# Altium PCB PMSM_M007U_Fan.PcbDoc
Units mil, origin at the board's own origin, x right, y up, seen from the top; angles counter-clockwise.
Board outline 2867 x 1502 mil, 2 copper layers (Top Layer, Bottom Layer); 65 components, 42 nets, 188 pads, 168 vias.
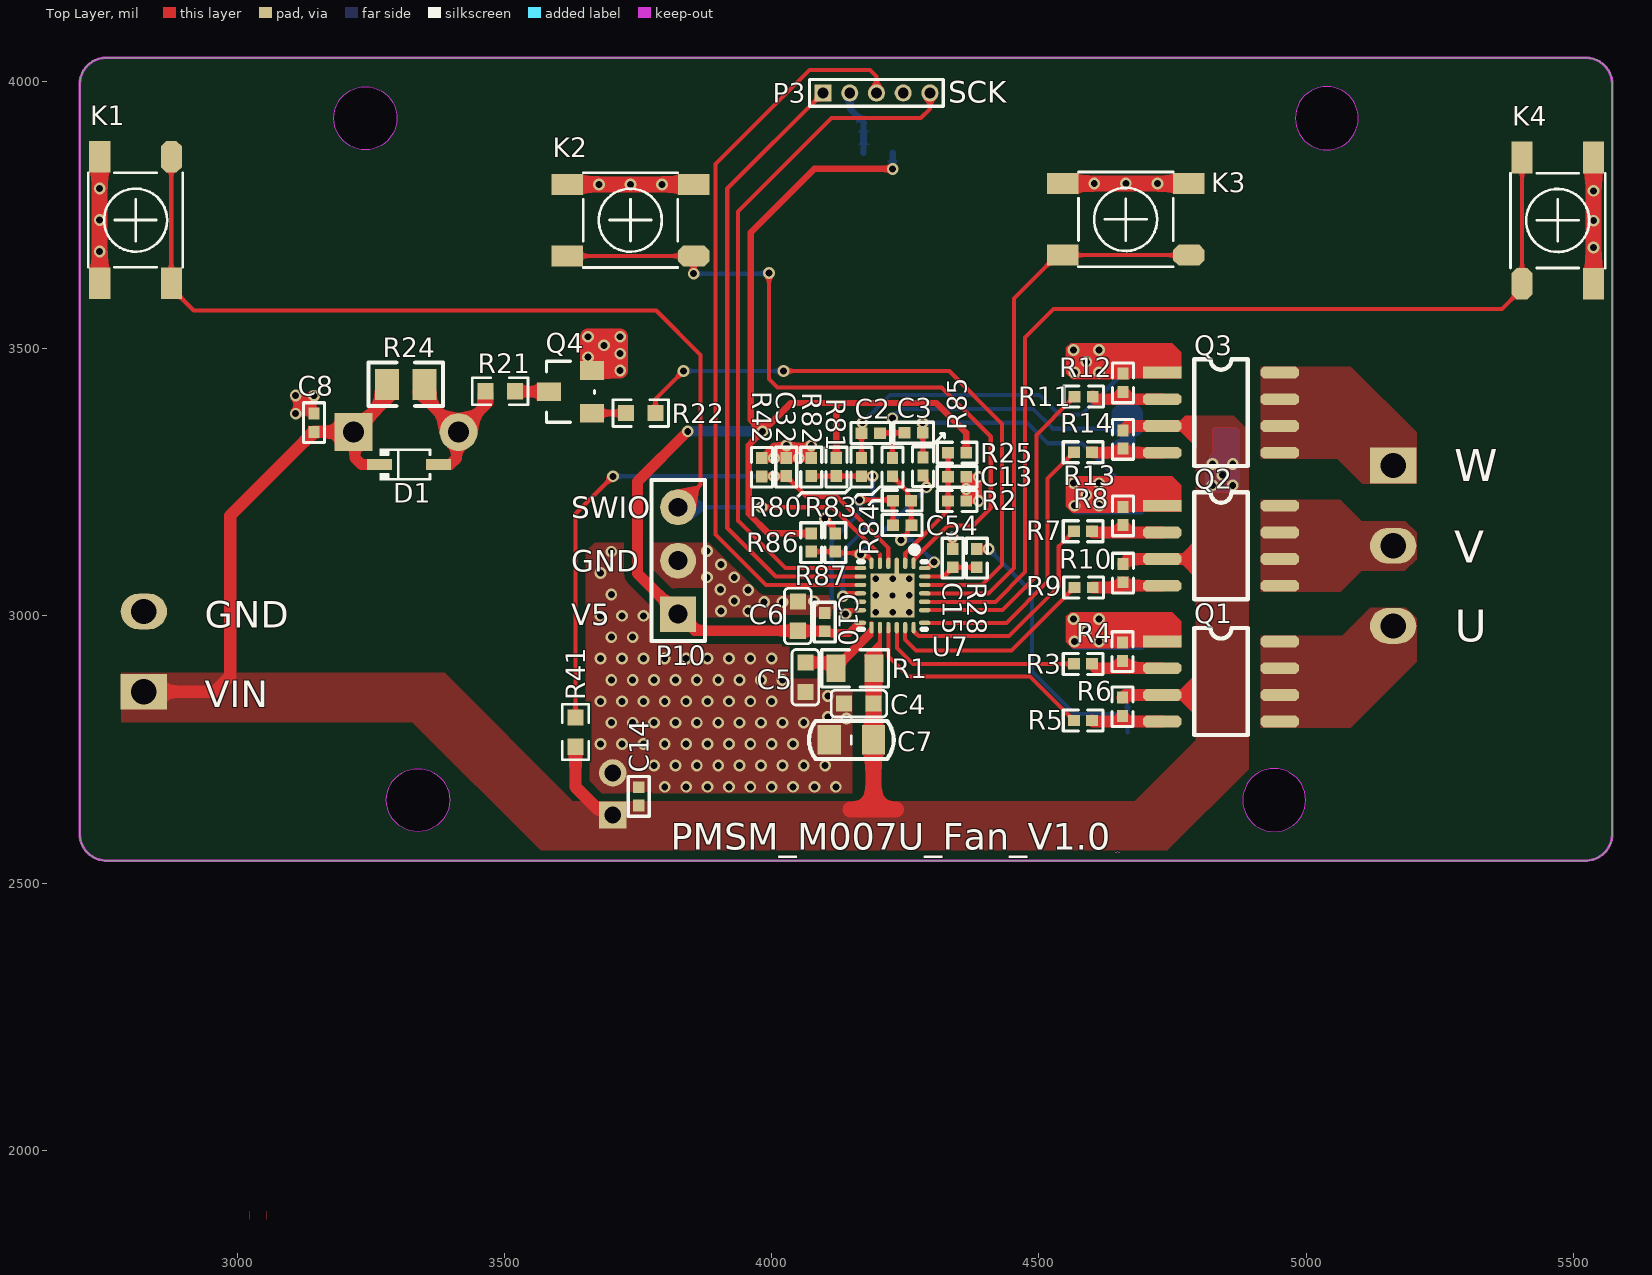
[diagram p0: Top Layer view]
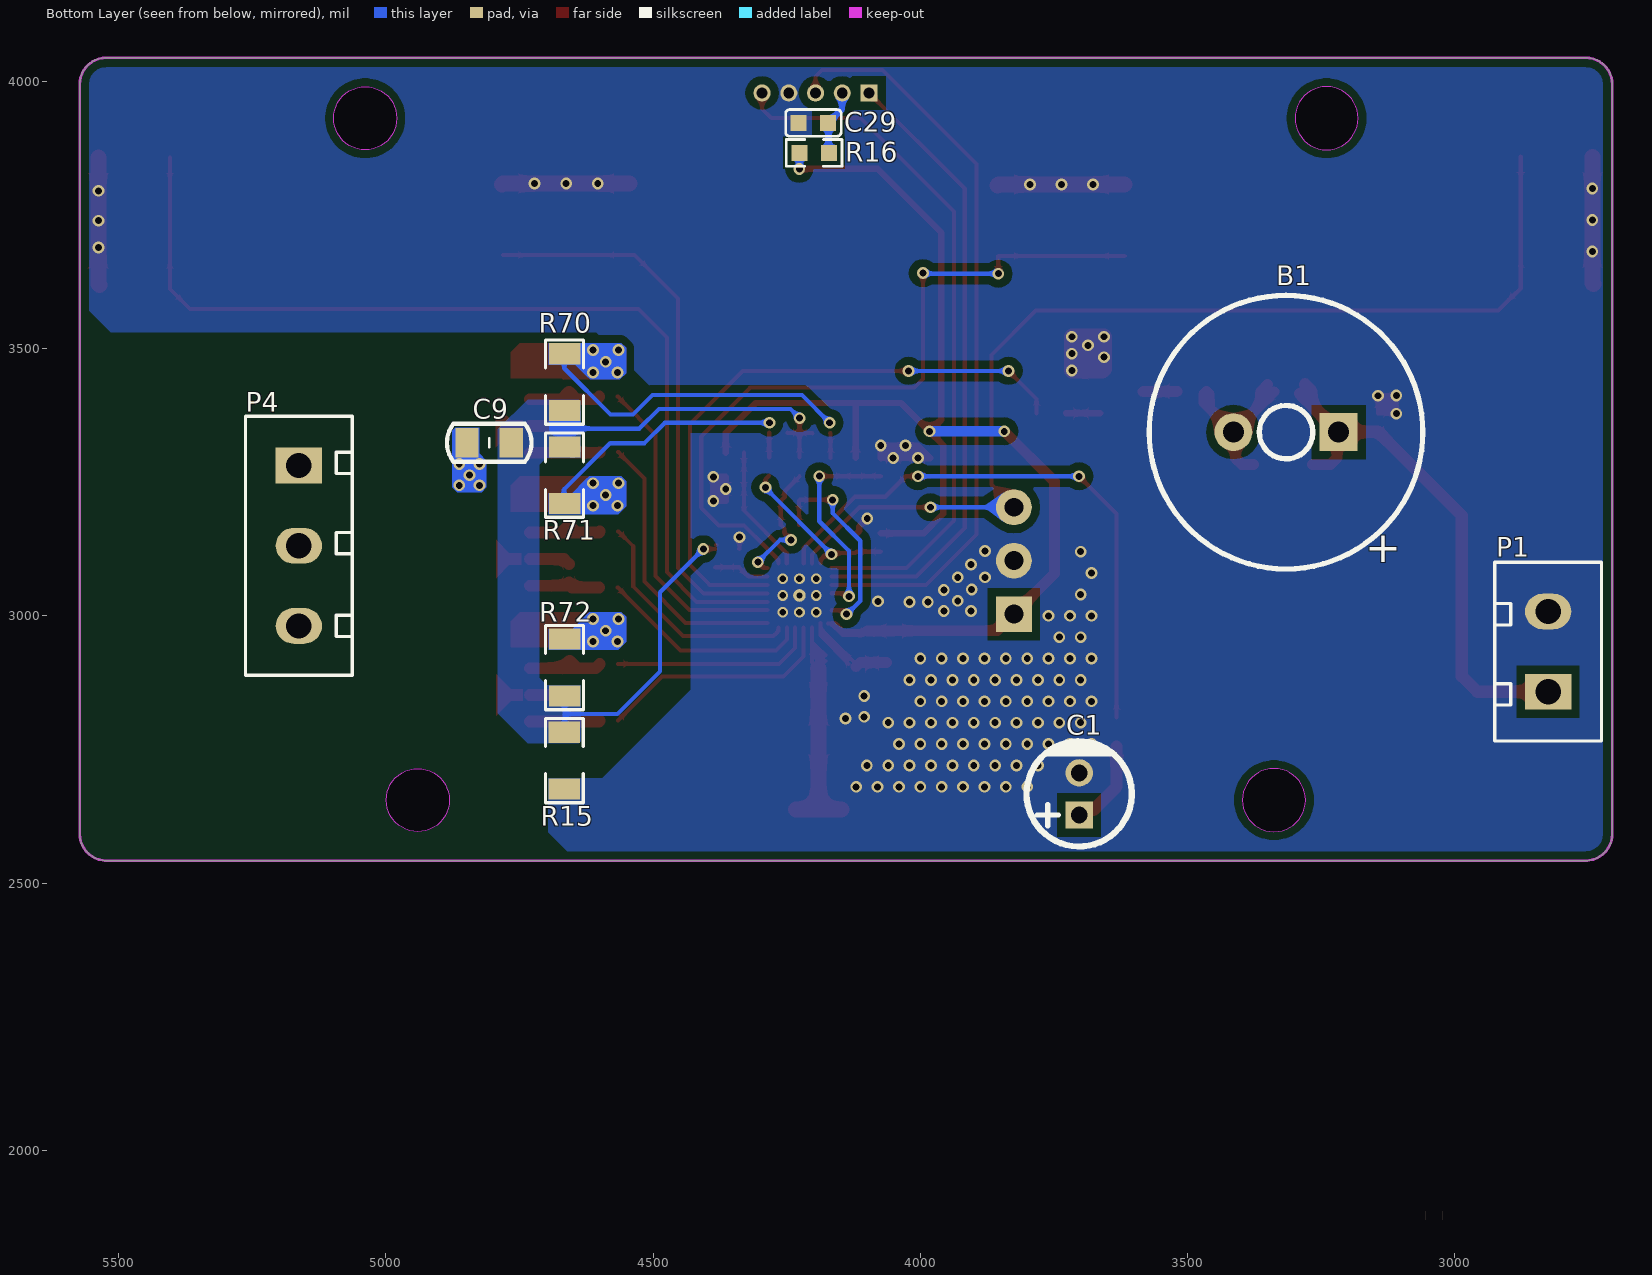
[diagram p1: Bottom Layer view, seen from below]

## Layer stack, top to bottom
Top Solder: solder mask 0.4, Solder Resist, Dk 3.5
Top Layer: signal copper 1.4
Dielectric1: dielectric 12.6, FR-4, Dk 4.8
Bottom Layer: signal copper 1.4
Bottom Solder: solder mask 0.4, Solder Resist, Dk 3.5

## Board outline
2705.52,2592 ccw(c2755.52,2592) 2755.52,2542 5522.52,2542 ccw(c5522.52,2592) 5572.52,2592 5572.52,3994 ccw(c5522.52,3994) 5522.52,4044 2791.52,4044 2755.52,4044 ccw(c2755.52,3994) 2705.52,3994
cut-out: 3240.01,3871.71 cw(c3240.01,3930.76) 3180.96,3930.76 cw(c3240.01,3930.76) 3240.01,3989.82 cw(c3240.01,3930.76) 3299.07,3930.76 cw(c3240.01,3930.76)
cut-out: 3338.44,2596.12 cw(c3338.44,2655.17) 3279.38,2655.17 cw(c3338.44,2655.17) 3338.44,2714.23 cw(c3338.44,2655.17) 3397.49,2655.17 cw(c3338.44,2655.17)
cut-out: 4979.38,3930.76 ccw(c5038.44,3930.76) 5038.44,3871.71 ccw(c5038.44,3930.76) 5097.49,3930.76 ccw(c5038.44,3930.76) 5038.44,3989.82 ccw(c5038.44,3930.76)
cut-out: 4880.96,2655.17 ccw(c4940.01,2655.17) 4940.01,2596.12 ccw(c4940.01,2655.17) 4999.07,2655.17 ccw(c4940.01,2655.17) 4940.01,2714.23 ccw(c4940.01,2655.17)

## Design rules (kind name [scope] priority, off if disabled: settings)
Clearance Clearance_1 [InPolygon] p1: gap=15 ignorepadtopadclearanceinfootprint=FALSE except(0: Arc-Hole Track-Hole SMDPad-Hole THPad-Hole Via-Hole Fill-Hole Poly-Hole Region-Hole Text-Hole)
Clearance [All] p2: gap=6 ignorepadtopadclearanceinfootprint=FALSE except(0: Arc-Hole Track-Hole SMDPad-Hole THPad-Hole Via-Hole Fill-Hole Poly-Hole Region-Hole Text-Hole)
PolygonConnect [All] p1: connectstyle=Direct reliefconductorwidth=10 reliefentries=4 polygonreliefangle="90 Angle" airgapwidth=10
RoutingVias [All] p1: holewidth=13 width=22 viastyle="Through Hole" minholewidth=13 minwidth=22 maxholewidth=28 maxwidth=50
SolderMaskExpansion [All] p1: expansion=4 istentingtop=FALSE
Width [All] p1: maxlimit=100 minlimit=6 preferedwidth=10 minimp=50.000000 maximp=50.000000 favimp=50.000000
30 further rules are at their usual default settings.

## Components (designator, comment, footprint, x,y, rotation, side; value= is the part's Value field where it differs from the comment)
B1 "BUZZER" M_BUZZER12550 3314.93,3344.42 r0 bottom
C1 "47uF/35V" M_C_RB_D5F2 3701,2667 r90 bottom
C2 "100pF" M_C0402- 4184.47,3341.32 r180 top
C3 "100pF" M_C0402- 4266.33,3342.68 r0 top
C4 "NC" M_C0603 4163.12,2833.54 r180 top
C5 "2.2uF/25V" M_C0603 4065,2885 r270 top
C6 "10uF" M_C0603 4047,2999.5 r90 top
C7 "10uF/25V" M_C0805 4152.12,2768.54 r180 top
C8 "0.1uF/25V" M_C0402- 3143.52,3362 r90 top
C9 "1uF/50V" M_C0805 4809.52,3323 r180 bottom
C10 "0.1uF" M_C0402- 4099,2989 r90 top
C13 "0.1uF" M_C0402- 4347.78,3260.37 r0 top
C14 "0.1uF/50V" M_C0402- 3751,2663 r90 top
C15 "1nF" M_C0402- 4339,3107 r270 top
C29 "10uF" M_C0603 4200,3920 r0 bottom
C32 "0.1uF" M_C0402- 4027,3279 r90 top
C54 "NC" M_C0402- 4245,3170 r0 top
D1 "4148" SOD-323 3321.52,3283 r180 top
K1 "KH-6X6X8H-STM" KEY2-SMD 2808,3739.52 r270 top
K2 "KH-6X6X8H-STM" KEY2-SMD 3735,3742 r180 top
K3 "KH-6X6X8H-STM" KEY2-SMD 4661.57,3743.47 r180 top locked
K4 "KH-6X6X8H-STM" KEY2-SMD 5472.52,3740 r90 top locked
P1 "POWER" WJ15EDGRC3.81-2 2820.52,2933 r90 bottom
P3 "5PIN" M_PIN1.27_5P 4196,3978 r0 top
P4 "MHDR1X3" WJ15EDGRC3.81-3 5162.52,3131 r270 bottom
P10 "SWD" HDR2.54-LI-3P 3825,3153 r180 top
Q1 "" SOP8 4730.52,2952 r270 top
Q2 "" SOP8 4730.52,3206 r270 top
Q3 "" SOP8 4730.52,3455 r270 top
Q4 "S8050" SOT23 3623.52,3419 r90 top
R1 "100 Ω" M_R0805- 4155.69,2901.54 r0 top
R2 "1k 1%" M_R0402- 4346.14,3213.37 r180 top
R3 "47 Ω" M_R0402- 4581.65,2908.63 r180 top
R4 "20k" M_R0402- 4657.52,2932 r270 top
R5 "47 Ω" M_R0402- 4581.65,2802.63 r180 top
R6 "NC /(20k)" M_R0402- 4657.52,2829 r270 top
R7 "47 Ω" M_R0402- 4581.65,3156.63 r180 top
R8 "20k" M_R0402- 4658.52,3186 r270 top
R9 "47 Ω" M_R0402- 4582.65,3051.63 r180 top
R10 "NC /(20k)" M_R0402- 4658.52,3079 r270 top
R11 "47 Ω" M_R0402- 4582.65,3408.63 r180 top
R12 "20k" M_R0402- 4658.52,3435 r270 top
R13 "47 Ω" M_R0402- 4581.65,3304.63 r180 top
R14 "NC /(20k)" M_R0402- 4658.52,3329 r270 top
R15 "0R100/1W" M_R1206- 4667,2728 r90 bottom
R16 "0Ω / NC" M_R0603 4171.5,3867 r0 bottom
R21 "100Ω" M_R0603 3519.02,3421 r180 top
R22 "1kΩ" M_R0603 3728,3378 r0 top
R24 "2kΩ" M_R0805 3348.52,3433 r180 top
R25 "15k 1%" M_R0402- 4347.78,3306.37 r0 top
R28 "10k" M_R0402- 4385,3107 r270 top
R41 "4.7k 1%" M_R0603 3632,2809.5 r270 top
R42 "1.5k 1%" M_R0402- 3983,3277 r270 top
R70 "0R100/1W" M_R1206- 4666.52,3436 r90 bottom
R71 "0R100/1W" M_R1206- 4664.52,3264 r270 bottom
R72 "0R100/1W" M_R1206- 4666.52,2902 r90 bottom
R80 "2.4k 1%" M_R0402- 4169.47,3277.29 r270 top
R81 "30k 1%" M_R0402- 4122.42,3277.43 r270 top
R82 "10k 1%" M_R0402- 4075.51,3277.43 r270 top
R83 "2.4k 1%" M_R0402- 4227.47,3277.29 r270 top
R84 "7.5k 1%" M_R0402- 4243,3214 r180 top
R85 "2.4k 1%" M_R0402- 4284.47,3278.32 r270 top
R86 "30k 1%" M_R0402- 4075.37,3136.22 r270 top
R87 "10k 1%" M_R0402- 4120.37,3136.22 r270 top
U7 "CH32M007E8U" QFN26C_3X3 4226.12,3038.04 r180 top

## Footprints (in the part's own frame and the unit in brackets; to place one, negate y for a bottom-side part, rotate by r counter-clockwise, add the part's x,y. Pads: shape width x height; smd on the part's side, far side on the other; paste and mask are expansions set on the pad)
HDR2.54-LI-3P [mm]
  rect 1.7x1.7 hole 0.9: 1(0,3.81)
  round 1.7 hole 0.9: 2(0,1.27) 3(0,-1.27)
  silkscreen extent -1.27,-2.57 1.27,5.08
KEY2-SMD [mm]
  oct 1.5x1 smd: 1(-3.023,1.749)
  rect 1.5x1 smd: 2(2.977,1.749) 3(-3.023,-1.651) 4(2.977,-1.651)
  silkscreen extent -2.27,-2.2 2.23,2.3
M_BUZZER12550 [mm]
  rect 1.8x1.8 hole 1: 1(-2.477,0.023)
  round 1.8 hole 1: 2(2.523,0.023)
  silkscreen extent -6.48,-6.48 6.52,6.52
M_C0402- [mm]
  rect 0.566x0.54 smd mask+0.051: 1(-0.454,-0.009) 2(0.412,-0.009)
  silkscreen extent -0.97,-0.51 0.92,0.49
M_C0603 [mil]
  rect 30x30 smd: 1(-27.5,-2) 2(27.5,-2)
  silkscreen extent -52,-27 52,23
M_C0805 [mm]
  rect 1.1x1.4 smd: 1(-0.972,0.019) 2(1.128,0.019)
  silkscreen extent -1.93,-0.88 2.09,0.92
M_C_RB_D5F2 [mm]
  rect 1.3x1.3 hole 0.8: 1(-1.005,0.045)
  round 1.3 hole 0.8: 2(0.995,0.045)
  silkscreen extent -2.5,-2.45 2.49,2.55
M_PIN1.27_5P [mil]
  rect 32x32 hole 20: 1(-100,0)
  round 32 hole 20: 2(-50,0) 3(0,0) 4(50,0) 5(100,0)
  silkscreen extent -125,-25 125,25
M_R0402- [mm]
  rect 0.566x0.54 smd mask+0.051: 1(-0.454,-0.035) 2(0.412,-0.035)
  silkscreen extent -0.97,-0.53 0.92,0.46
M_R0603 [mil]
  rect 30x30 smd: 1(-0.5,1) 2(54.5,1)
  silkscreen extent -25,-24 79,26, body extent -4,-15 58,17, height 16
M_R0805 [mm]
  rect 1.16x1.47 smd: 1(-0.051,0) 2(1.729,0)
  silkscreen extent -0.93,-1.04 2.61,1.03
M_R0805- [mm]
  rect 0.9x1.3 smd: 1(-0.9,0) 2(0.9,0)
  silkscreen extent -1.57,-0.89 1.6,0.89, body extent -1,-0.63 1,0.63, height 0.5
M_R1206- [mm]
  rect 1x1.5 smd: 1(-1.325,-0.025) 2(1.375,-0.025)
  silkscreen extent -1.97,-0.93 2.03,0.87
QFN26C_3X3 [mm]
  rect 2.1x2.1 smd mask+0.051: 0(0,0)
  round 0.6 hole 0.3 mask+0.051: 0(0,0)
  oval 0.2x0.55 smd mask+0.051: 1(-1,-1.525) 2(-0.6,-1.525) 4(0.2,-1.525) 5(0.6,-1.525) 6(1,-1.525) 14(1,1.525) 15(0.6,1.525) 16(0.2,1.525) 17(-0.2,1.525) 18(-0.6,1.525) 19(-1,1.525)
  oval 0.2x1 smd mask+0.051: 3(-0.2,-1.3)
  oval 0.55x0.2 smd mask+0.051: 7(1.525,-1.3) 8(1.525,-0.9) 9(1.525,-0.5) 10(1.525,-0.1) 11(1.525,0.3) 12(1.525,0.7) 13(1.525,1.3) 20(-1.525,1.3) 21(-1.525,0.7) 22(-1.525,0.3) 23(-1.525,-0.1) 24(-1.525,-0.5) 25(-1.525,-0.9) 26(-1.525,-1.3)
  silkscreen extent -1.6,-2.33 1.6,1.6
SOD-323 [mil]
  rect 47.24x20 smd: 1(-55,0) 2(55,0)
  silkscreen extent -39,-30 55,30
SOP8 [mil]
  rect 22x72 smd: 1(0,0)
  oct 22x72 smd: 2(50,0) 3(100,0) 4(150,0) 5(150,220) 6(100,220) 7(50,220) 8(0,220)
  silkscreen extent -25,60 175,160
SOT23 [mil]
  rect 35x45 smd: 1(-40,-40) 2(40,-40) 3(0,40)
  silkscreen extent -57,-45 57,45
WJ15EDGRC3.81-2 [mm]
  rect 1.7x2.2 hole 1.2: 1(-1.905,0.127)
  oval 1.7x2.2 hole 1.2: 2(1.905,0.127)
  silkscreen extent -4.25,-2.41 4.25,2.67
WJ15EDGRC3.81-3 [mm]
  rect 1.7x2.2 hole 1.2: 1(-3.81,0)
  oval 1.7x2.2 hole 1.2: 2(0,0) 3(3.81,0)
  silkscreen extent -6.15,-2.54 6.15,2.54

## Part data
C1: library part "CAPACITOR POL_2", "Capacitor"
C2 C3 C4 C5 C6 C7 C8 C9 C10 C13 C14 C15 C29 C32 C54: library part "Cap Semi", "Capacitor (Semiconductor SIM Model)"
D1: library part "Diode 1N4148", "High Conductance Fast Diode"
P1: library part 2PIN
P4: "Header, 3-Pin"
P10: library part 3PIN
Q1 Q2 Q3: library part NP9926BSR-G
Q4: library part NPN1
R1 R2 R3 R4 R5 R6 R7 R8 R9 R10 R11 R12 R13 R14 R15 R16 R21 R22 R24 R25 R28 R41 R42 R70 R71 R72 R80 R81 R82 R83 R84 R85 R86 R87: library part Res2, "Resistor"
U7: library part CH32M007E8U6, "RISC-V MCU, 48MHz, OPA/CMP/UART/I2C, 24V P/NMOS gate driver for motor"

## Via types
v1: diameter 22, hole 13, Top Layer to Bottom Layer, tented both sides, 160 vias
v2: diameter 20, hole 12, Top Layer to Bottom Layer, tented both sides, 8 vias

## Nets (pads, with @x,y where several pads share a name; then routed paths per layer and width w, separated by ;. In a path a pad name is that pad's centre, name@x,y a point inside that pad or via, vN(x,y) a via of type N, cw(c..) or ccw(c..) an arc to the next point about the centre after c; other vN are vias at no path point)
ADC_I1: C54.1 R84.2 U7.12 | length 386.9
  Top Layer w8: v1(4138,3003) 4145.48,3010.48 U7.12 ; v1(4164,3217) 4225.15,3217 R84.2 4226.96,3215.2 4226.96,3169.8 C54.1
  Bottom Layer w8: v1(4138,3003) 4137.28,3003 4112.49,3027.79 4112.49,3140.49 4164,3192 v1(4164,3217)
ADC_Vbus: C32.1 R41.1 R42.2 U7.4 | length 1102.6
  Top Layer w8: R41.1 3633,3191 v1(3702.96,3260.96) ; R42.2 3981.8,3260.96 v1(4004.5,3260.96) 4027.2,3260.96 C32.1 4065.71,3222.8 4122.2,3222.8 4218.24,3126.76 U7.4
  Bottom Layer w8: v1(3702.96,3260.96) v1(4004.5,3260.96) v1(4004.5,3260.96)
BEEP_CTRL: R22.2 U7.24 | length 1162
  Top Layer w8: R22.2 3782.5,3405.5 v1(3835,3458) ; v1(4022,3458) 4332,3458 4431,3359 4431,3095 4393.72,3057.72 U7.24
  Bottom Layer w8: v1(3835,3458) v1(4022,3458)
CMP1_N0: C15.2 R28.2 U7.25 | length 104.9
  Top Layer w8: U7.25 4321.82,3073.47 4338.63,3090.28 C15.2 R28.2
CMP1_P0: C13.1 R2.2 R25.1 U7.2 | length 240.1
  Top Layer w8: U7.2 4249.8,3098.14 4249.8,3116.8 4329.8,3196.8 4329.8,3214.62 R2.2 C13.1 R25.1
GND: C1.2 C4.2 C5.2 C6.2 C7.2 C8.2 C10.2 C13.2 C14.2 C15.1 C29.2 C32.2 K1.3 K1.4 K2.3 K2.4 K3.3 K3.4 K4.3 K4.4 P1.2 P3.4 P10.2 Q4.2 R2.1 R15.1 R42.1 R82.1 R87.1 U7.0 U7.3 | length 2021.6
  Top Layer w8: v1(4338,3147) 4338.31,3146.68 4338.31,3125.18 C15.1 ; v1(3109.52,3378) 3109.73,3378.22 C8.2 v1(3143.89,3411.63) 3143.52,3412 v1(3109.52,3412) v1(3109.52,3378)
  Top Layer w12: v1@4004.54,3295.04 3981.8,3295.04 R42.1 3981.63,3295.37 3993.2,3306.94 ; v1(4004.54,3295.08) 4027.23,3295.08 C32.2 4027.41,3295.25 C32.2@4027.5,3295.25 ; C32.2@4027.5,3295.17 C32.2@4027.5,3295.25 ; R82.1@4073.92,3295.08 R82.1@4074.01,3295.17 ; R82.1@4074.01,3294.99 R82.1@4074.01,3295.17 ; v1(4099.3,3182) 4114.37,3166.93 4114.37,3158.71 R87.1 ; 3993.2,3306.94 4004.77,3318.51 v1(4027.5,3318.51) ; 3993.2,3306.94 4027.5,3306.94 ; C32.2@4027.5,3295.25 4027.5,3306.94 ; C32.2@4027.5,3295.25 v1(4050.75,3295.25) R82.1@4074.01,3295.27 ; 4027.5,3306.94 v1(4027.5,3318.51) ; 4027.5,3306.94 4073.73,3306.94 4074.01,3306.66 ; v1(4027.5,3318.51) 4027.58,3318.42 4073.92,3318.42 v1(4074.01,3318.34) 4074.01,3306.66 ; R82.1@4074.01,3295.17 R82.1@4074.01,3295.27 ; R82.1@4074.01,3295.17 R82.1 R82.1@4074.01,3295.27 ; R82.1@4074.01,3295.27 4074.01,3306.66 ; 4375.63,3214.7 4387.21,3214.7 v1(4387.26,3214.65) v1(4387.26,3259.91) 4387.21,3259.96 4375.63,3259.96 ; 4375.63,3214.7 R2.1 R2.1 v1(4364,3237.37) C13.2 C13.2 4375.63,3259.96 ; 4375.63,3214.7 4375.63,3259.96
  Top Layer w30: K1.4@2741.02,3620.3 K1.4 v1(2743,3740.39) K1.3 ; K2.4 v1(3735.91,3806.97) K2.3 K2.3@3856,3804.98 ; K3.4@4544.37,3808.44 v1(4662.48,3808.44) 4780.59,3808.44 K3.3@4782.57,3806.46 ; K4.3@5535.52,3619.02 K4.3 v1(5537.5,3739.11) K4.4 ; v1(3656.52,3483.75) 3656.52,3461.5 3659.02,3459 Q4.2 v1(3716.52,3459) v1@3716.52,3482.5 ; v1(3656.52,3483.75) 3656.52,3506 ; v1(3656.52,3483.75) 3715.27,3483.75 v1@3716.52,3482.5 ; 3656.52,3506 v1(3656.52,3522) v1(3716.52,3522) 3716.52,3506 ; 3656.52,3506 v1(3686.52,3506) 3716.52,3506 ; v1@3716.52,3482.5 v1(3716.52,3490.25) 3716.52,3506
  other v1: 3800,2680 3840,2680 3880,2680 3920,2680 3960,2680 4000,2680 4040,2680 4080,2680 4120,2680 3780,2720 3820,2720 3860,2720 3900,2720 3940,2720 3980,2720 4020,2720 4060,2720 4100,2720 3680,2760 3720,2760 3760,2760 3800,2760 3840,2760 3880,2760 3920,2760 3960,2760 4000,2760 4040,2760 3700,2800 3740,2800 3780,2800 3820,2800 3860,2800 3900,2800 3940,2800 3980,2800 4020,2800 4060,2800 4140,2808 4105,2811 3680,2840 3720,2840 3760,2840 3800,2840 3840,2840 3880,2840 3920,2840 3960,2840 4000,2840 4105,2850 3700,2880 3740,2880 3780,2880 3820,2880 3860,2880 3900,2880 3940,2880 3980,2880 4020,2880 3680,2920 3720,2920 3760,2920 3800,2920 3840,2920 3880,2920 3920,2920 3960,2920 4000,2920 3700,2960 3740,2960 3680,3000 3720,3000 3760,3000 3905,3009 3956,3009 3986,3026 4020,3026 4079,3027 3930,3028 3700,3040 3956,3048 3904,3049 3879,3072 3930,3072 3680,3080 3905,3096 3700,3120 3879,3121 2743,3681.33 5537.52,3689 5537.52,3795 2743,3799.44 3676.85,3806.97 3794.96,3806.97 4603.42,3808.44 4721.53,3808.44
  other v2: 4194.62,3006.54 4226.12,3006.54 4257.62,3006.54 4194.62,3038.04 4257.62,3038.04 4194.62,3069.54 4226.12,3069.54 4257.62,3069.54
I1_shunt: C2.1 C3.1 C9.2 R15.2 R28.1 R70.1 R71.1 R72.1 R83.1 | length 1267.4
  Top Layer w8: C2.1 4202.65,3342 4225.85,3342 ; v1(4225.6,3369.7) 4225.85,3369.45 4225.85,3342 ; R83.1@4226.1,3296.18 4225.85,3296.43 4225.85,3342 ; C3.1 4248.15,3342 4225.85,3342 ; R28.1@4381.86,3132.37 R28.1@4381.93,3132.44 ; R28.1 v1(4405.86,3124.86)
  Bottom Layer w8: v1(4225.6,3369.7) 4242.89,3387 4489,3387 4526,3350 4650.99,3350 4665.52,3350 ; v1(4405.86,3124.86) 4406.14,3124.86 4487,3044 4487,2896 4566.76,2816.24 4665.52,2816.24 ; R72.1 4665.52,2816.24 ; R15.2 4665.52,2782.63 4665.52,2816.24
  Bottom Layer w30: R71.1@4650.99,3311 R71.1@4650.99,3316.15 ; 4650.99,3350 4650.99,3379.17 4655.67,3383.85 R70.1 ; R71.1 4665.52,3350 ; R70.1@4675.36,3383.85 4680.04,3379.17 4680.04,3350
KEY2: K2.1 K2.2 U7.1 | length 1393
  Top Layer w8: K2.2 K2.1 v1(3854,3640) ; v1(3995,3641) 3995,3443 4011,3427 4317.91,3427 4410,3334.91 4410,3202 4377,3169 4329.64,3169 4289.64,3129 4265.48,3104.84 U7.1
  Bottom Layer w8: v1(3854,3640) 3994,3640 v1(3995,3641)
KEY3: K3.1 K3.2 U7.23 | length 1051.7
  Top Layer w7.5: U7.23 4405.98,3041.98 4453,3089 4453,3593.09 4518.57,3658.66 4534.51,3674.6 K3.2 K3.1
KEY4: K4.1 K4.2 U7.22 | length 1862.7
  Top Layer w7.5: U7.22 4418.23,3026.23 4474,3082 4474,3521 4527,3574 5366,3574 5403.64,3611.64 K4.2
M1_CH1_H: R5.2 U7.16 | length 451
  Top Layer w7.5: U7.16 4218.25,2931.51 4218.59,2931.17 4218.59,2923.41 4256,2886 4483.44,2886 R5.2
M1_CH1_L: R3.2 U7.17 | length 381.9
  Top Layer w7.5: U7.17 4234.07,2977.93 4234.07,2939.93 4264,2910 R3.2
M1_CH2_H: R9.2 U7.18 | length 397
  Top Layer w7.5: U7.18 4249.75,2955.25 4270,2935 4448.44,2935 4559.05,3045.61 4559.05,3046.12 4565.93,3053 R9.2
M1_CH2_L: R7.2 U7.19 | length 435.7
  Top Layer w7.5: U7.19 4265.5,2971.21 4274.71,2962 4444,2962 4537,3055 4537,3130.07 4564.93,3158 R7.2
M1_CH3_H: R13.2 U7.20 | length 524.6
  Top Layer w7.5: U7.20 4438.86,2986.86 4516,3064 4516,3256.56 4558.05,3298.61 4558.05,3299.12 4564.93,3306 R13.2
M1_CH3_L: R11.2 U7.21 | length 601
  Top Layer w7.5: U7.21 4431.48,3010.48 4495,3074 4495,3338.56 4559.05,3402.61 4559.05,3403.12 4565.93,3410 R11.2
M1_Iu: Q1.1 R4.1 R72.2
  other v1: 4566.52,2952 4612.52,2952 4588.52,2972 4564.52,2994 4612.52,2994
M1_Iv: C3.2 Q2.1 R8.1 R71.2 R85.1 | length 583.3
  Top Layer w8: C3.2 4282.82,3342.04 4282.82,3296.45 R85.1
  Top Layer w22: R8.1 4657.38,3203.86 4659.52,3206 Q2.1
  Bottom Layer w8: v1(4282.1,3361.1) 4477.9,3361.1 4516,3323 4580,3323 4666.52,3236.48 R71.2@4666.52,3209.85
  other v1: 4566.52,3206 4612.52,3206 4588.52,3226 4564.52,3248 4612.52,3248
M1_Iw: C2.2 Q3.1 R12.1 R70.2 R80.1 | length 778.9
  Top Layer w8: R80.1 4168.18,3295.26 4168.18,3341.61 C2.2
  Top Layer w22: R12.1 4657.38,3452.86 4659.52,3455 Q3.1
  Bottom Layer w8: v1(4169.6,3361.1) 4221.5,3413 4501,3413 4537.5,3376.5 4579.5,3376.5 4666.02,3463.02 R70.2@4666.02,3489.65 ; R70.2@4636.52,3475 4650.37,3475 R70.2 R70.2@4666.02,3489.65 ; R70.2@4686.52,3475 4680.66,3475 R70.2@4666.02,3489.65
  other v1: 4566.52,3455 4612.52,3455 4588.52,3475 4564.52,3497 4612.52,3497
M1_U: P4.3 Q1.5 Q1.6 Q1.7 Q1.8
M1_V: P4.2 Q2.5 Q2.6 Q2.7 Q2.8
M1_W: P4.1 Q3.5 Q3.6 Q3.7 Q3.8
M_CS: P3.1 U7.8 | length 1174.7
  Top Layer w8: P3.1 3917,3799 3917,3164 4007.53,3073.47 U7.8
M_MOSI: P3.3 U7.9 | length 1413
  Top Layer w8: U7.9 3989.28,3057.72 3895,3152 3895,3845 4071,4021 4184,4021 4196,4009 P3.3
M_SCK: P3.5 U7.7 | length 1312.4
  Top Layer w8: U7.7 4025.78,3089.22 3937,3178 3937,3756 4112,3931 4279,3931 4296,3948 P3.5
NetB1_2: B1.2 D1.1 R21.2 R24.1 | length 375
  Top Layer w20: R24.1@3338.52,3419.26 3363.35,3394.43 ; R24.1 3363.35,3420.17 3363.35,3394.43 ; D1.1 3398.81,3283 3410.53,3294.72 3410.53,3339.76 B1.2 ; 3363.35,3394.43 B1.2 ; B1.2 3459.52,3388.75 ; 3459.52,3388.75 3459.52,3415 R21.2 3469.52,3415 3469.52,3398.75 3459.52,3388.75
NetC5_1: C5.1 R1.1 U7.14 | length 349.5
  Top Layer w7.5: R1.1 4120.25,2904.78 4120.25,2909.42 R1.1@4134.22,2923.38 ; R1.1@4134,2910 4186.68,2962.68 U7.14@4186.68,2971.04 ; R1.1@4134,2918.35 4139.03,2923.38 ; U7.14@4186.66,2986.95 4186.66,2975.82 R1.1@4134.22,2923.38 ; R1.1@4134.22,2923.38 4139.03,2923.38 ; 4139.03,2923.38 U7.14@4186.68,2971.04 ; U7.14@4186.68,2971.04 4186.76,2971.11 U7.14 4186.68,2977.93 U7.14@4186.68,2971.04
  Top Layer w20: C5.1 4112.54,2912.5 R1.1@4120.25,2904.78
NetQ1_2: Q1.2 R3.1 R4.2 | length 190.1
  Top Layer w22: R3.1 4599.52,2909.76 4607.28,2902 4642.13,2902 ; 4686.32,2902 4670.17,2902 ; Q1.2 4670.17,2902 ; 4642.13,2902 4655.91,2915.78 R4.2 4656.38,2915.78 4670.17,2902 ; 4642.13,2902 4670.17,2902
NetQ1_4: Q1.4 R5.1 R6.2 | length 167.3
  Top Layer w22: R5.1 4599.52,2803.76 4601.28,2802 4645.13,2802 ; 4671.52,2802 4667.17,2802 ; Q1.4 4667.17,2802 ; 4645.13,2802 4667.17,2802 ; 4645.13,2802 4655.91,2812.78 R6.2 4656.38,2812.78 4667.17,2802
NetQ2_2: Q2.2 R7.1 R8.2 | length 187.1
  Top Layer w22: R7.1 4599.52,3157.76 4601.28,3156 4643.13,3156 ; 4686.82,3156 4671.17,3156 ; Q2.2 4671.17,3156 ; 4643.13,3156 4656.91,3169.78 R8.2 4657.38,3169.78 4671.17,3156 ; 4643.13,3156 4671.17,3156
NetQ2_4: Q2.4 R9.1 R10.2 | length 164.5
  Top Layer w22: R9.1 R10.2@4647.13,3053 ; 4673.52,3056 R10.2@4664.17,3056 ; Q2.4 R10.2@4664.17,3056 ; R10.2@4647.13,3053 4656.91,3062.78 R10.2 4657.38,3062.78 R10.2@4664.17,3056 ; R10.2@4647.13,3053 4651.58,3053 4654.58,3056 R10.2@4664.17,3056
NetQ3_2: Q3.2 R11.1 R12.2 | length 187.3
  Top Layer w22: R11.1 4600.52,3409.76 4605.28,3405 4643.13,3405 ; 4686.82,3405 4671.17,3405 ; Q3.2 4671.17,3405 ; 4643.13,3405 4671.17,3405 ; 4643.13,3405 4656.91,3418.78 R12.2 4657.38,3418.78 4671.17,3405
NetQ3_4: Q3.4 R13.1 R14.2 | length 162.4
  Top Layer w22: R13.1 4599.52,3305.76 4600.28,3305 R14.2@4649.13,3305 ; 4673.52,3305 R14.2@4665.17,3305 ; Q3.4 R14.2@4665.17,3305 ; R14.2@4649.13,3305 R14.2@4665.17,3305 ; R14.2@4649.13,3305 4656.91,3312.78 R14.2 4657.38,3312.78 R14.2@4665.17,3305
NetQ4_1: Q4.1 R22.1 | length 64
  Top Layer w12: Q4.1 R22.1
NetQ4_3: Q4.3 R21.1 | length 64.4
  Top Layer w20: R21.1 3520.02,3419.5 3583.02,3419.5 Q4.3
OPA_N0: C54.2 R83.2 R84.1 U7.26 | length 243.9
  Top Layer w8: R83.2 4226.1,3260.57 4253.73,3232.94 4253.73,3222 4260.36,3215.37 R84.1 4261.04,3215.2 4261.04,3169.8 C54.2 4260.71,3169.63 4254.08,3163 4254.08,3154.08 v1(4242,3142) ; U7.26 4292.92,3089.22 v1(4304,3100.3)
  Bottom Layer w8: v1(4242,3142) 4262.3,3142 v1(4304,3100.3)
OPA_P1: R80.2 R81.2 R82.2 U7.10 | length 397.5
  Top Layer w8: R82.2@4074,3261.35 R82.2 4167.96,3261.21 R80.2 v1(4188.93,3261.07) ; v1(4133.49,3036.49) 4138.98,3041.98 U7.10
  Bottom Layer w8: v1(4133.49,3036.49) 4133.49,3121.49 4188.93,3176.93 v1(4188.93,3261.07)
OPA_P2: R85.2 R86.2 R87.2 U7.6 | length 325.3
  Top Layer w8: R86.2 R87.2 4121.5,3117.5 4163.5,3117.5 v1(4166,3115) 4176.59,3115 4186.74,3104.84 U7.6 ; R85.2 4289.73,3255.47 v1(4289.73,3240.27)
  Bottom Layer w8: v1(4166,3115) v1@4289.73,3238.73
SWIO: K1.1 K1.2 P10.3 U7.5 | length 2020.7
  Top Layer w8: K1.1 K1.2 2876.87,3612.45 2892.56,3596.77 2893.23,3596.77 2919,3571 3784,3571 3867,3488 3867,3245 P10.3 ; v1(3981,3203) 4114,3203 4202.43,3114.57 4202.43,3098.14 U7.5
  Bottom Layer w8: P10.3 v1(3981,3203)
V5: C6.1 C10.1 P10.1 R16.2 R25.2 R81.1 R86.1 U7.13 | length 2632.7
  Top Layer w7.5: U7.13 4159.19,2986.86 4143.47,2971.14 C10.1 4099.37,2970.88 4106.25,2964 4146,2964 4168,2986 U7.13@4173.07,2986
  Top Layer w12: R86.1 3993.92,3154.08 3957,3191 3957,3319 3972,3334 ; R81.1 4121.05,3396.05 4123,3398 ; v1(4226.33,3836) 4080,3836 3961,3717 3961,3367 3972,3356 ; R25.2 4364,3342 4308,3398 4123,3398 ; 3972,3334 3972,3356 ; 3972,3334 v1(3983,3345) ; 3972,3356 3994,3356 ; 3972,3356 v1(3983,3345) ; v1(3983,3345) 3994,3356 ; 3994,3356 4036,3398 4123,3398
  Top Layer w20: v1(3843,3345) 3749,3251 3749,3079 P10.1 3856,2972 C6.1 4049.43,2971.57 4098.94,2971.57 C10.1
  Bottom Layer w12: R16.2 4226.16,3865.84 4226.16,3836.16 v1(4226.33,3836)
  Bottom Layer w20: v1(3843,3345) v1(3983,3345)
VCC2: C29.1 P3.2 R16.1 | length 123.6
  Bottom Layer w12: P3.2 4146.53,3977.47 4146.53,3947.97 C29.1 4171.75,3921.25 4171.75,3866.75 R16.1
Vin: B1.1 C1.1 C4.1 C7.1 C8.1 C9.1 C14.1 D1.2 P1.1 Q1.3 Q2.3 Q3.3 R1.2 R6.1 R10.1 R14.1 R24.2 R41.2 U7.15 | length 2063.8
  Top Layer w7.5: R1.2@4177.31,2926 4182.31,2931 ; R1.2@4177.5,2915.86 4177.15,2915.51 R1.2@4182.31,2910.36 ; R1.2@4181.38,2923.38 R1.2@4182.31,2922.45 ; R1.2@4183.37,2923.38 R1.2@4185.25,2921.5 ; R1.2@4189.12,2917.8 R1.2@4189.04,2917.71 ; R1.2@4190.62,2901.04 4182.31,2909.36 R1.2@4182.31,2910.36 ; U7.15 4202.5,2951.2 ; R1.2@4182.31,2910.36 R1.2@4182.31,2922.45 ; R1.2@4182.31,2910.36 R1.2@4184.14,2908.53 ; R1.2@4182.31,2922.45 4183.26,2921.5 R1.2@4185.25,2921.5 ; R1.2@4182.31,2922.45 4182.31,2931 ; 4182.31,2931 4187.65,2936.35 ; R1.2@4184.14,2908.53 4185.25,2909.64 R1.2@4185.25,2921.5 ; R1.2@4184.14,2908.53 R1.2 R1.2@4192.94,2903.36 ; R1.2@4185.25,2921.5 4185.77,2921.5 4187.65,2923.38 4187.65,2936.35 ; R1.2@4185.25,2921.5 R1.2@4189.04,2917.71 ; 4187.65,2936.35 4193,2941.69 ; R1.2@4189.04,2917.71 R1.2@4192.94,2917.71 ; R1.2@4192.94,2903.36 R1.2@4193,2903.42 ; R1.2@4192.94,2903.36 R1.2@4192.94,2917.71 ; R1.2@4192.94,2917.71 R1.2@4193,2917.78 ; R1.2@4193,2903.42 R1.2@4193,2917.78 ; R1.2@4193,2903.42 4202.5,2912.93 4202.5,2951.2 ; R1.2@4193,2917.78 4197.75,2922.53 4197.75,2946.45 ; R1.2@4193,2917.78 4193,2941.69 ; 4193,2941.69 4197.75,2946.45 ; 4197.75,2946.45 4202.5,2951.2
  Top Layer w20: B1.1 3220.52,3340.41 3220.52,3295 3232.52,3283 D1.2
  Top Layer w22: R6.1 4656.38,2846.86 4661.52,2852 Q1.3 ; R10.1 4657.38,3096.86 4666.52,3106 Q2.3 ; R14.1 4657.38,3346.86 4665.52,3355 Q3.3
  Top Layer w23: P1.1 2958,2858 2987,2887 2987,3187.25 C8.1 3210.79,3344.14 3213.79,3347.14 B1.1 3269.1,3395.19 ; R24.2 3269.1,3421.67 3269.1,3395.19 ; R24.2@3289.52,3415.6 3269.1,3395.19 ; R41.2 3633,2680 3676,2637 3693.21,2637 C1.1
  Top Layer w30: 4147.4,2637.4 4190.4,2637.4 ; R1.2 4190.62,2901.04 C4.1 4190.62,2768.02 C7.1 4190.4,2637.4 ; 4232.6,2637.4 4190.4,2637.4
  other v1: 4824.52,3244 4862.52,3244 4843.52,3263 4824.52,3284 4862.52,3284
pads on no net: U7.11

## Polygon pours and split planes (outlines as drawn)
GND on Top Layer "NONET_L03_P-001" (solid, remove dead copper, pour order 10): 4151,2660 4144,2653 3660,2653 3633,2680 3633,3101 3669,3137 3910,3137 3989.28,3057.72 4150.72,3057.72 4151,3058
M1_U on Top Layer "NONET_L-01_P-001" (solid, pour order 3): 5119.51,3015 5186.52,3015 5206.52,2995 5206.52,2914 5083.52,2791 4914.52,2791 4914.52,2963 5067.52,2963
M1_W on Top Layer "NONET_L-01_P-001" (solid, pour order 2): 5206.52,3247 5206.52,3343 5083.52,3466 4914.52,3466 4914.52,3294 5057.52,3294 5104.51,3247
M1_V on Top Layer "NONET_L-01_P-001" (solid, pour order 1): 4914.52,3217 5063.51,3217 5103.51,3177 5185.52,3177 5206.52,3156 5206.52,3106 5184.51,3084 5103.51,3084 5064.51,3045 4914.52,3045
Vin on Top Layer "NONET_L-01_P-001" (solid, pour order 0): 3388,2893 2783,2893 2783,2801 3328,2801 3567.97,2561.03 4740.03,2561.03 4892,2713 4892,3346.51 4864.49,3374.03 4793.54,3374.03 4793.48,2767.48 4679,2653 3628,2653
I1_shunt on Bottom Layer "Bottom Layer-I1_shunt" (solid, remove dead copper, pour order 7): 4790,3348.52 4734.51,3404 4635.52,3404 4635.52,3296 4699.52,3296 4713,3282.52 4713,2884 4699,2870 4635,2870 4635,2762 4734,2762 4790,2818
GND on Bottom Layer "NONET_L-01_P-001" (solid, pour order 4): 4696,2696 4595,2696 4429,2862 4429,3353 4606,3530 5514.52,3530 5572.52,3588 5572.52,4008.18 5535.69,4045 2705.52,4045 2705.52,2541.69 4462.52,2541 4642,2541 4696,2595

## Keep-outs
Keep-Out Layer:
  pour cut-out: 3240.01,3871.71 cw(c3240.01,3930.76) 3180.96,3930.76 cw(c3240.01,3930.76) 3240.01,3989.82 cw(c3240.01,3930.76) 3299.07,3930.76 cw(c3240.01,3930.76)
  pour cut-out: 4979.38,3930.76 ccw(c5038.44,3930.76) 5038.44,3871.71 ccw(c5038.44,3930.76) 5097.49,3930.76 ccw(c5038.44,3930.76) 5038.44,3989.82 ccw(c5038.44,3930.76)
  pour cut-out: 3338.44,2596.12 cw(c3338.44,2655.17) 3279.38,2655.17 cw(c3338.44,2655.17) 3338.44,2714.23 cw(c3338.44,2655.17) 3397.49,2655.17 cw(c3338.44,2655.17)
  pour cut-out: 3338.44,2596.12 cw(c3338.44,2655.17) 3279.38,2655.17 cw(c3338.44,2655.17) 3338.44,2714.23 cw(c3338.44,2655.17) 3397.49,2655.17 cw(c3338.44,2655.17)
  lines w5: 2705.52,2592 ccw(c2755.52,2592) 2755.52,2542 5522.52,2542 ccw(c5522.52,2592) 5572.52,2592 5572.52,3994 ccw(c5522.52,3994) 5522.52,4044 2791.52,4044 2755.52,4044 ccw(c2755.52,3994) 2705.52,3994 2705.52,2592

## Other copper
Top Layer:
  region net GND: 4364,3214.74 4364.09,3214.65 4387.26,3214.65 4387.26,3259.91 4387.17,3260 4364,3260
  region net GND: 4074.14,3295.29 4074.01,3295.42 4074.01,3318.34 4027.67,3318.34 4027.5,3318.51 4004.77,3318.51 3981.63,3295.37 3981.63,3294.86 4004.36,3294.86 4004.75,3295.25 4073.75,3295.25 4074.01,3294.99
  region net V5: 4170.53,2986 4169.68,2986.86 4159.19,2986.86 4143.47,2971.14 4074.62,2971.14 4081.75,2964 4146,2964 4168,2986
  region net M1_Iu: 4562.52,2939 4550.52,2951 4550.52,2998 4559.52,3007 4749.52,3007 4766.52,2990 4766.52,2941 4669.52,2941 4667.52,2939
  region net Vin: 4743.52,3366 4765.52,3366 4773.51,3374 4794,3374 4794,3315.51 4765.52,3344 4743.52,3344
  region net M1_Iv: 4562.52,3193 4550.52,3205 4550.52,3252 4559.52,3261 4749.52,3261 4766.52,3244 4766.52,3195 4669.52,3195 4667.52,3193
  region net M1_Iw: 4562.52,3442 4550.52,3454 4550.52,3501 4559.52,3510 4749.52,3510 4766.52,3493 4766.52,3444 4669.52,3444 4667.52,3442
  region net Vin: 4746.52,3117 4768.52,3117 4793.51,3142 4793.52,3070 4768.52,3095 4746.52,3095
  region net Vin: 4743.52,2863 4765.52,2863 4793.52,2891 4793.52,2813 4765.52,2841 4743.52,2841
  region net GND: 3109.52,3412 3109.73,3411.78 3109.73,3378.22 3143.89,3378.22 3143.89,3411.63
Bottom Layer:
  region net M1_Iu: 4651.52,2975 4626.52,3000 4619.52,3007 4559.52,3007 4550.52,2998 4550.52,2951 4565.52,2936 4583.52,2936 4695.52,2936 4695.52,2975
  region net Vin: 4825.52,3304 4825.52,3352 4869.52,3352 4875.52,3346 4875.52,3289 4875.51,3240 4866.52,3231 4839.52,3231 4820.52,3231 4811.52,3240 4811.52,3290
  region net M1_Iw: 4645.52,3470 4624.52,3449 4617.52,3442 4562.52,3442 4550.52,3454 4550.52,3501 4559.52,3510 4695.52,3510 4695.52,3470
  region net M1_Iv: 4651.52,3229 4626.52,3254 4619.52,3261 4559.52,3261 4550.52,3252 4550.52,3205 4565.52,3190 4583.52,3190 4695.52,3190 4695.52,3229

## Silkscreen, mask and mechanical layers (free items; w line width, h text height)
Top Overlay:
  lines w5: 2770.84,3740.47 2849.01,3740.47 ; 2810.37,3701.11 2810.37,3779.11 ; 3696.75,3740.47 3774.92,3740.47 ; 3736,3701 3736,3779 ; 4623.04,3741.47 4701.21,3741.47 ; 4662.57,3702.11 4662.57,3780.11 ; 5431.04,3739.94 5509.21,3739.94 ; 5470.57,3700.57 5470.57,3778.57 5470.57,3700.57
  lines w6: 4047,3221 4056,3230 4137.53,3230 4148.47,3240.94 ; 4154,3219 4162,3227 4188,3227 4201.94,3240.94 4206.47,3240.94 ; 4182,3208 4189.37,3215.37 4206.65,3215.37 ; 4302.73,3316.32 4302.73,3320.73 4323,3341 ; 4316,3341 4323,3341 ; 4323,3333 4323,3341
  text "SCK" at 4330,3960 h40
  text "W" at 5277,3252 h60
  text "SWIO" at 3625,3182 h40
  text "V" at 5277,3099 h60
  text "GND" at 3625,3082 h40
  text "V5" at 3625,2982 h40
  text "GND" at 2939.52,2978 h50
  text "U" at 5278,2951 h60
  text "VIN" at 2939.52,2829 h50
  text "PMSM_M007U_Fan_V1.0" at 3811,2562.33 h50
  text "YYYY" at 4642.02,2554.5 h3
Mechanical 1:
  lines w5: 2773.52,4044.01 5524.52,4044.01 cw(c5524.52,3996) 5572.53,3996 5572.53,2595 cw(c5519.52,2595) 5519.52,2541.99 5475.63,2541.99 cw(c5475.02,2544.94) 5475.02,2541.92 2812,2542 ; 2779.56,4044.01 ccw(c2779.52,4041) 2779.52,4044.01 2758.52,4044.01 ccw(c2758.52,3991) 2705.5,3991 2705.5,3983.03 ccw(c2708.51,3983) 2705.5,3983 2705.5,2595 ccw(c2758.52,2595) 2705.5,2594.97 ccw(c2758.52,2595) 2758.52,2541.99 2812.4,2541.99 ccw(c2813.02,2544.94) 2813.02,2541.92 ; 3180.96,3930.76 ccw(c3240.01,3930.76) 3240.01,3871.71 ccw(c3240.01,3930.76) 3299.07,3930.76 ccw(c3240.01,3930.76) 3240.01,3989.82 ccw(c3240.01,3930.76) 3180.96,3930.76 ; 3279.38,2655.17 ccw(c3338.44,2655.17) 3338.44,2596.12 ccw(c3338.44,2655.17) 3397.49,2655.17 ccw(c3338.44,2655.17) 3338.44,2714.23 ccw(c3338.44,2655.17) 3279.38,2655.17 ; 4880.96,2655.17 ccw(c4940.01,2655.17) 4940.01,2596.12 ccw(c4940.01,2655.17) 4999.07,2655.17 ccw(c4940.01,2655.17) 4940.01,2714.23 ccw(c4940.01,2655.17) 4880.96,2655.17 ; 4979.38,3930.76 ccw(c5038.44,3930.76) 5038.44,3871.71 ccw(c5038.44,3930.76) 5097.49,3930.76 ccw(c5038.44,3930.76) 5038.44,3989.82 ccw(c5038.44,3930.76) 4979.38,3930.76

## Text inside footprints (layer, text, board x,y; h text height)
B1: Bottom Overlay "+" at 3099.93,3169.42 h100 r180